# Altium PCB ups_lead_acid_electgpl_v1.0(1).PcbDoc (part 2 of 2)
Units mm, origin at the board's own origin, x right, y up, seen from the top; angles counter-clockwise.
Board outline 152.4 x 101.6 mm, 2 copper layers (F.Cu, B.Cu); 78 components, 42 nets, 240 pads, 288 vias.
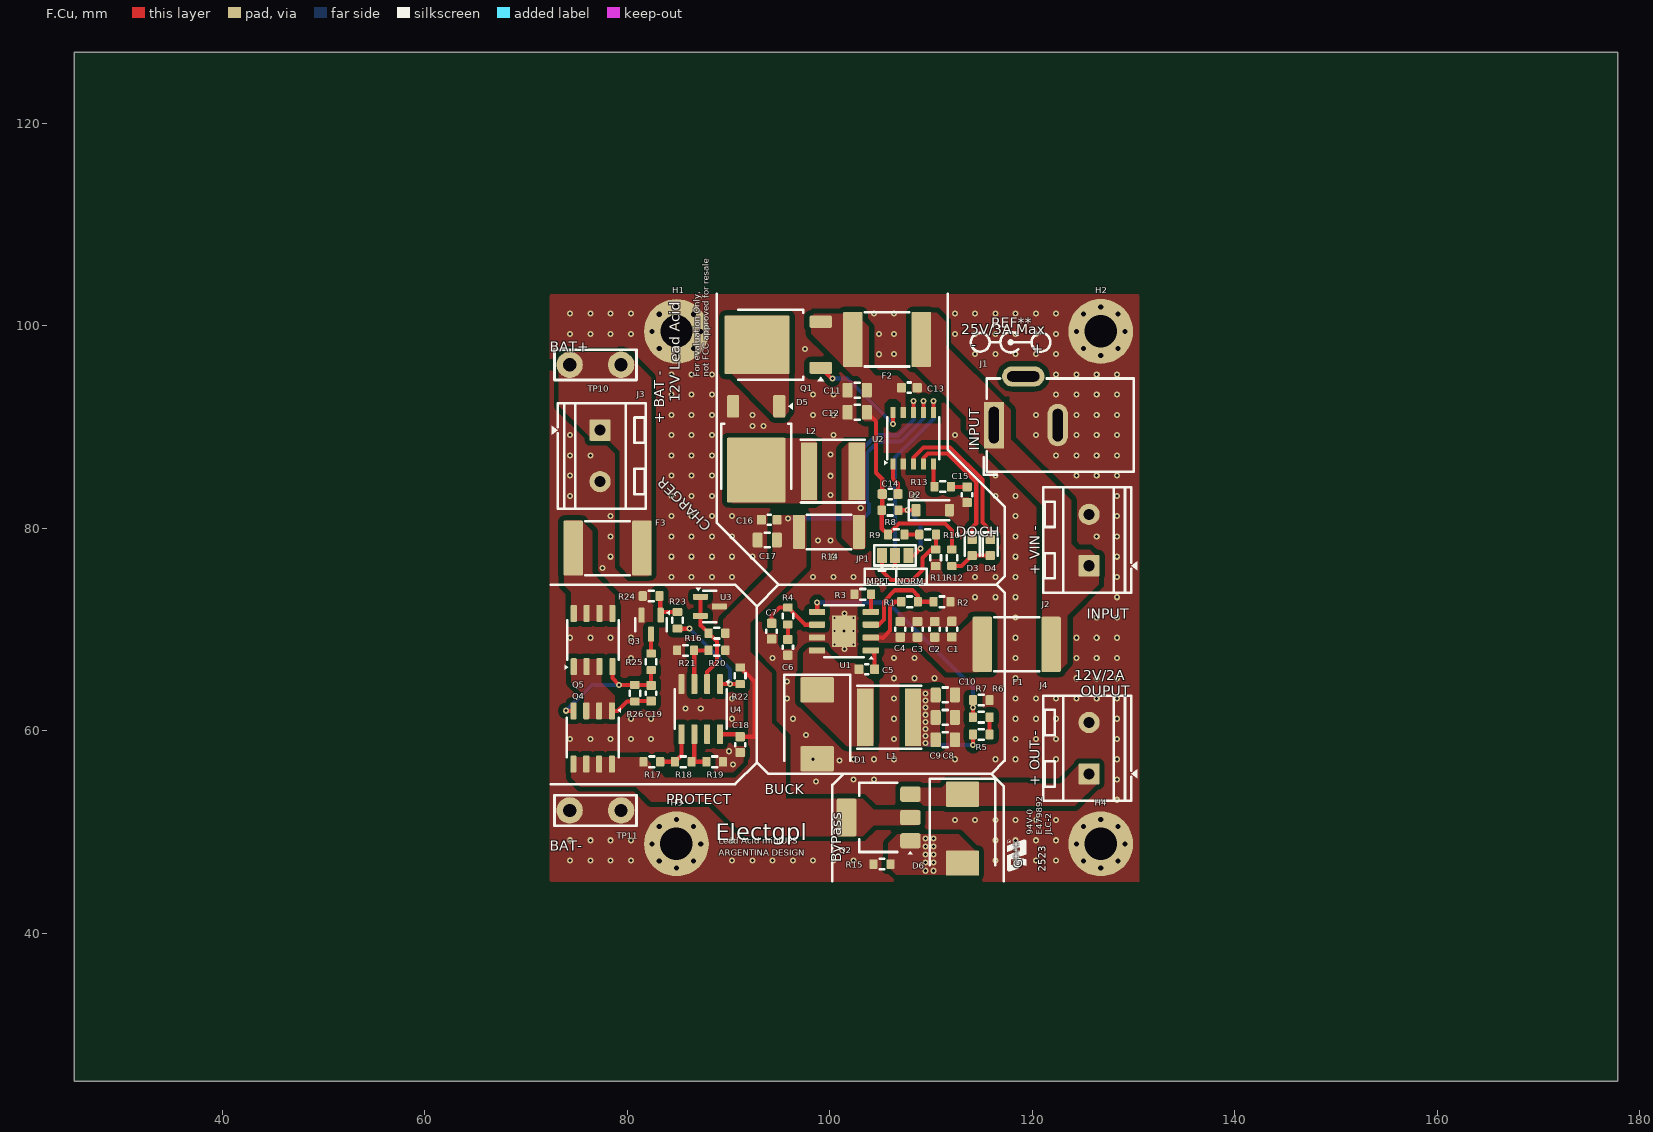
[diagram p0: F.Cu view]

## Silkscreen, mask and mechanical layers (free items; w line width, h text height) (continued)
F.SilkS: (continued)
  text "PROTECT" at 83.856,52.743 h1
  text "94V-0 / E479892 / JLC-2" at 121.87,49.717 h0.61 r90
  text "Electgpl" at 88.731,49.176 h1.63
  text "Lead Acid miniUPS" at 89.056,48.866 h0.61
  text "BAT-" at 72.356,48.143 h1
  text "ARGENTINA DESIGN" at 89.056,47.68 h0.61
  text "ByPass" at 101.123,47.043 h1 r90
  text "2523" at 121.325,46.061 h0.71 r90
Edge.Cuts:
  lines w0.254: 72.456,47.143 ccw(c74.456,47.142) 74.456,45.143 128.456,45.143 ccw(c128.456,47.142) 130.456,47.143 130.456,101.143 ccw(c128.456,101.143) 128.456,103.143 74.456,103.143 ccw(c74.456,101.143) 72.456,101.143 72.456,47.143